# Altium PCB PCB_C70005-A1.PcbDoc (part 1 of 4)
Units mm, origin at the board's own origin, x right, y up, seen from the top; angles counter-clockwise.
Board outline 80.01 x 50.8 mm, 2 copper layers (Top Layer, Bottom Layer); 96 components, 63 nets, 254 pads, 376 vias.
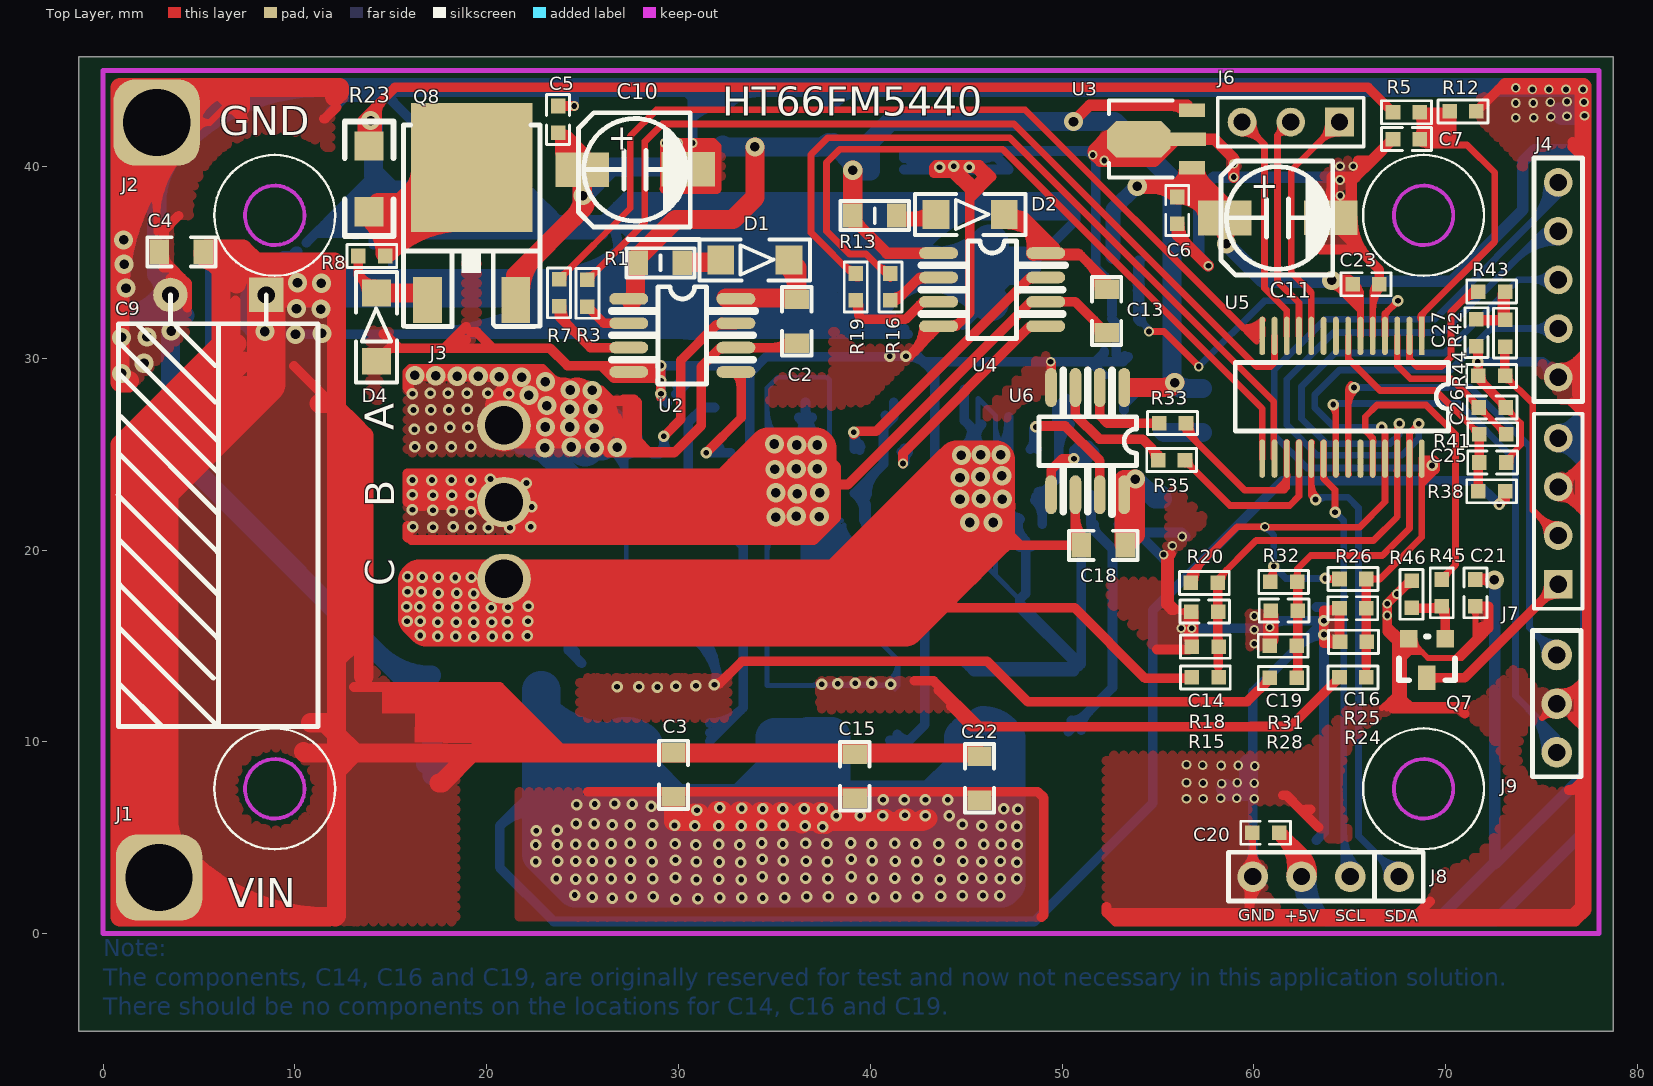
[diagram p0: Top Layer view]
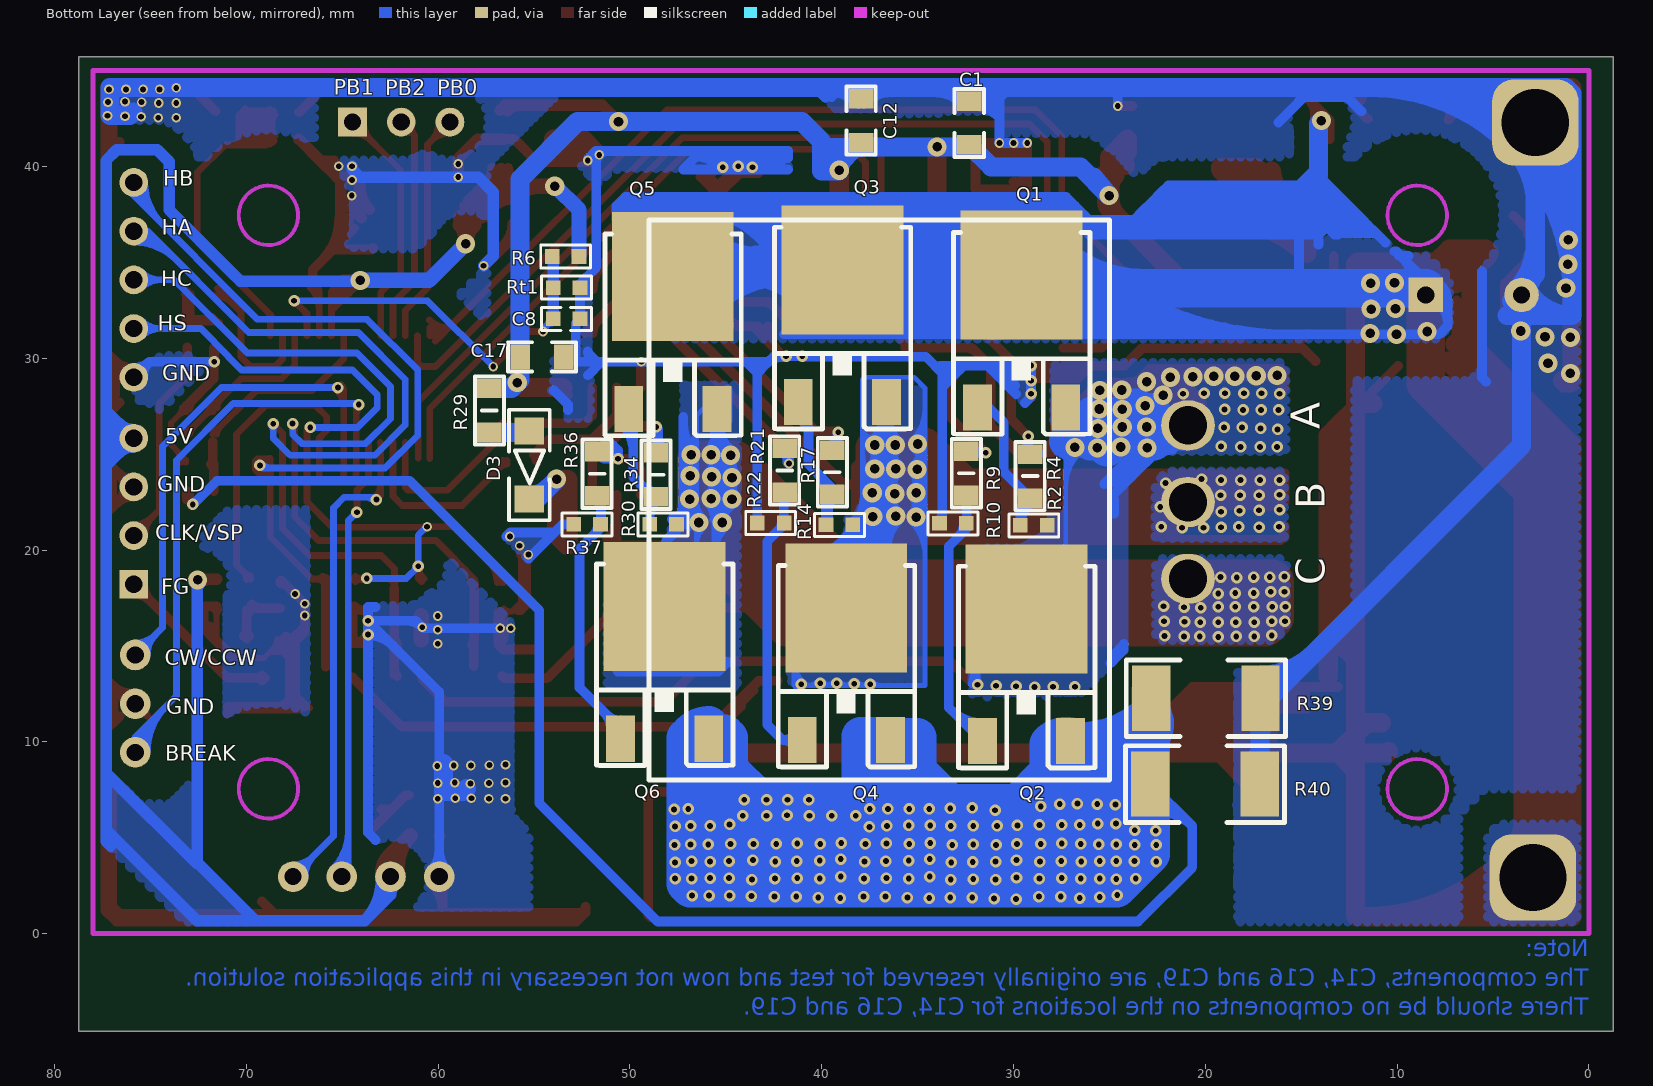
[diagram p1: Bottom Layer view, seen from below]

## Layer stack, top to bottom
Top Layer: signal copper 0.0356
Dielectric: dielectric 0.32, FR-4, Dk 4.8
Bottom Layer: signal copper 0.0356

## Board outline
-1.27,-5.08 78.74,-5.08 78.74,45.72 -1.27,45.72

## Design rules (kind name [scope] priority, off if disabled: settings)
Clearance [All] p1: gap=0.254
Clearance Clearance_1 [All vs InNet('GND')] p2: gap=1
ComponentClearance [All] p1: gap=0 collisioncheckmode=3 verticalgap=0 showdistances=FALSE
HoleToHoleClearance [All] p1: gap=0.1 allowstackedmicrovias=TRUE
MinimumSolderMaskSliver [All] p1: minsoldermaskwidth=0.1
PlaneConnect [All] p1: planeconnectstyle=Direct reliefexpansion=0.508 reliefentries=4 reliefconductorwidth=0.254 reliefairgap=0.254
PolygonConnect [All] p1: connectstyle=Direct reliefconductorwidth=0.254 reliefentries=4 polygonreliefangle="90 Angle" airgapwidth=0.254
RoutingVias [All] p1: holewidth=0.711 width=1.27 viastyle="Through Hole" minholewidth=0.3 minwidth=0.4 maxholewidth=0.711 maxwidth=1.27
SilkToSilkClearance [All] p1: silktosilkclearance=0
SilkscreenOverComponentPads [All] p1: minsilkscreentomaskgap=0
SolderMaskExpansion [All] p1: expansion=0.102
Width [All] p1: maxlimit=3 minlimit=0.254 preferedwidth=0.254
22 further rules are at their usual default settings.

## Classes and differential pairs
component class HT66FM5440_5240_SNLS_SixStep_V2: C1 C2 C5 C6 C7 C8 C9 C12 C13 C14 C16 C17 C18 C19 C20 C21 C23 C25 C26 C27 D1 D2 D3 J1 J2 J3 J4 J6 J7 J8 J9 Q1 Q2 Q3 Q4 Q5 Q6 Q7 Q8 R1 R2 R3 R4 R5 R6 R7 R8 R9 R10 R12 R13 R14 R15 R16 R17 R18 R19 R20 R21 R22 R24 R25 R26 R28 R29 R30 R31 R32 R33 R34 R35 R36 R37 R38 R39 R40 R41 R42 R43 R44 R45 R46 Rt1 U2 U3 U4 U5 U6

## Components (designator, comment, footprint, x,y, rotation, side; value= is the part's Value field where it differs from the comment)
C1 "104/25V" 0805C 32.309,43.409 r270 bottom
C2 "4.7uF/25V" 0805C 36.17,33.071 r270 top
C3 "4.7uF/25V" 0805C 29.743,9.423 r270 top (schematic designator C18)
C4 "4.7uF/25V" 0805C 5.22,35.547 r180 top (schematic designator C18)
C5 "104" 0603C 23.724,41.758 r90 top
C6 "104" 0603C 56.007,38.405 r270 top
C7 "104" 0603C 68.656,41.427 r180 top
C8 "104" 0603C 54,32.055 r180 bottom
C9 "470uF/50V" CD-10.5*21 8.509,33.299 r180 top
C10 "6.3V220uF" 贴片电解电容35V47UF 27.737,39.827 r0 top
C11 "6.3V220uF" 贴片电解电容35V47UF 61.239,37.313 r0 top
C12 "104/25V" 0805C 37.948,43.536 r270 bottom
C13 "4.7uF/25V" 0805C 52.324,33.604 r270 top
C14 "224" 0603C 56.744,16.789 r0 top
C15 "4.7uF/25V" 0805C 39.192,9.347 r270 top (schematic designator C18)
C16 "224" 0603C 64.465,16.967 r0 top
C17 "104/25V" 0805C 53.442,30.074 r0 bottom
C18 "4.7uF/25V" 0805C 53.289,20.244 r180 top
C19 "224" 0603C 60.884,16.84 r0 top
C20 "104" 0603C 59.919,5.258 r0 top
C21 "104" 0603C 71.552,18.466 r270 top
C22 "4.7uF/25V" 0805C 45.695,9.246 r270 top (schematic designator C18)
C23 "104" 0603C 66.548,33.858 r180 top
C25 "104" 0603C 71.755,24.562 r0 top
C26 "105" 0603C 71.73,27.432 r0 top
C27 "105" 0603C 71.603,32.029 r270 top
D1 "1N4148" 1206D 32.207,35.128 r0 top
D2 "1N4148" 1206D 43.434,37.49 r0 top
D3 "1N4148" 1206D 55.245,26.213 r270 bottom
D4 "1N4148" 1206D 14.249,29.845 r90 top (schematic designator D2)
J1 "CON1" SIP1-big 2.921,2.921 r0 top
J2 "CON1" SIP1-big 2.794,42.291 r0 top
J3 "3-phase BLDC" SIP3-4mm 20.9,22.5 r180 top
J4 "BEMF_2.54mm" SIP5-2.54mm 75.87,39.167 r0 top
J6 "Obsever pin" HDR1X3 64.465,42.316 r180 top
J7 "Speed command" HDR1X4 75.87,18.212 r90 top
J8 "OCDS" SIP4 67.564,2.972 r180 top
J9 "Control port" SIP3-2.54mm 75.794,9.449 r180 top
Q1 "75NF75" TO252 31.877,27.432 r180 bottom
Q2 "75NF75" TO252 31.623,10.033 r180 bottom
Q3 "75NF75" TO252 41.224,27.711 r180 bottom
Q4 "75NF75" TO252 41.021,10.084 r180 bottom
Q5 "75NF75" TO252 50.063,27.356 r180 bottom
Q6 "75NF75" TO252 50.495,10.16 r180 bottom
Q7 "2N3904" SOT-23 69.037,14.351 r180 top
Q8 "LM317/TO-252" TO252 16.916,33.045 r0 top (schematic designator U1)
R1 "33R" 0805R 27.915,34.976 r0 top
R2 "10K" 0603R 28.245,21.285 r180 bottom
R3 "1K" 0603R 25.248,34.087 r90 top
R4 "33R" 0805R 29.134,22.708 r90 bottom
R5 "91K" 0603R 68.656,42.824 r0 top
R6 "10K" 0603R 54.051,35.306 r0 bottom
R7 "1K" 0603R 23.774,34.112 r90 top
R8 "240R" 0603R 13.31,35.331 r180 top
R9 "33R" 0805R 32.461,25.146 r270 bottom
R10 "10K" 0603R 32.461,21.387 r180 bottom
R12 "10K" 0603R 71.603,42.875 r0 top
R13 "33R" 0805R 39.091,37.44 r0 top
R14 "10K" 0603R 38.379,21.311 r180 bottom
R15 "22K" 0603R 56.769,13.36 r180 top
R16 "1K" 0603R 41.046,34.417 r90 top
R17 "33R" 0805R 39.446,22.911 r90 bottom
R18 "2K" 0603R 56.769,14.961 r180 top
R19 "1K" 0603R 39.243,34.417 r90 top
R20 "10K/1%" 0603R 56.718,18.288 r180 top
R21 "33R" 0805R 41.935,25.298 r270 bottom
R22 "10K" 0603R 41.961,21.412 r180 bottom
R23 "0R" 1206 13.868,41.072 r270 top
R24 "22K" 0603R 64.465,13.36 r180 top
R25 "2K" 0603R 64.491,15.215 r180 top
R26 "10K/1%" 0603R 64.465,18.491 r180 top
R28 "22K" 0603R 60.833,13.335 r180 top
R29 "33R" 0805R 57.328,28.423 r270 bottom
R30 "10K" 0603R 47.574,21.336 r180 bottom
R31 "2K" 0603R 60.833,15.011 r180 top
R32 "10K/1%" 0603R 60.858,18.339 r180 top
R33 "1K" 0603R 56.464,26.619 r0 top
R34 "33R" 0805R 48.641,22.784 r90 bottom
R35 "1K" 0603R 56.413,24.689 r0 top
R36 "33R" 0805R 51.714,25.121 r270 bottom
R37 "10K" 0603R 51.537,21.336 r180 bottom
R38 "1K/1%" 0603R 71.704,23.063 r180 top
R39 "0.01R" 2512 17.12,12.268 r0 bottom
R40 "0.01R" 2512 17.17,7.798 r0 bottom
R41 "10K" 0603R 73.152,26.035 r0 top
R42 "4.7K" 0603R 73.101,30.607 r270 top
R43 "0R" 0603R 73.101,33.477 r0 top
R44 "1M" 0603R 71.704,29.083 r180 top
R45 "4.7K" 0603R 69.799,17.069 r270 top
R46 "5.1K" 0603R 68.224,18.39 r90 top
Rt1 "68K" 0603R 52.603,33.68 r180 bottom
U2 "IR2101/SOP-8" SOP-8 27.407,33.096 r0 top
U3 "78L05" SOT-89 56.769,39.929 r90 top
U4 "IR2101/SOP-8" SOP-8 43.561,35.484 r0 top
U5 "HT66FM5440/28SSOP" SSOP28 68.758,31.166 r270 top
U6 "IR2101/SOP-8" SOP-8 53.238,28.473 r270 top

## Footprints (in the part's own frame and the unit in brackets; to place one, negate y for a bottom-side part, rotate by r counter-clockwise, add the part's x,y. Pads: shape width x height; smd on the part's side, far side on the other; paste and mask are expansions set on the pad)
0603C [mil]
  rect 30x30 smd: 1(55,0) 2(0,0)
  silkscreen extent -24,-24 79,24
0603R [mil]
  rect 30x30 smd: 1(0,0) 2(-55,0)
  silkscreen extent -79,-24 24,24
0805C [mil]
  rect 40x50 smd: 1(0,0) 2(90,0)
  silkscreen extent -25,-30 115,30
0805R [mil]
  rect 40x50 smd: 1(0,0) 2(90,0)
  silkscreen extent -25,-30 115,30
1206 [mil]
  rect 60x60 smd: 1(0,0) 2(135,0)
  silkscreen extent -50,-50 185,50
1206D [mm]
  rect 1.4x1.524 smd: 1(0,0) 2(3.553,0)
  silkscreen extent -1.1,-1.07 4.66,1.07
2512 [mm]
  rect 2x3.4 smd: 1(0,0) 2(5.7,0)
  silkscreen extent -1.3,-2 7,2
CD-10.5*21 [mm]
  rect 1.8x1.8 hole 0.9: 1(0,0)
  round 1.8 hole 0.9: 2(5,0)
  silkscreen extent -2.7,0 7.75,22.5
HDR1X3 [mm] "Connector; Header; 3 Position"
  rect 1.5x1.5 hole 0.9: 1(0,0)
  round 1.5 hole 0.9: 2(2.54,0) 3(5.08,0)
  silkscreen extent -1.27,-1.27 6.35,1.27
HDR1X4 [mm] "Connector; Header; 4 Position"
  rect 1.5x1.5 hole 0.9: 1(0,0)
  round 1.5 hole 0.9: 2(2.54,0) 3(5.08,0) 4(7.62,0)
  silkscreen extent -1.27,-1.27 8.89,1.27
SIP1-big [mm]
  rrect50% 4.5x4.5 hole 3.5: 1(0,0)
SIP3-2.54mm [mm]
  round 1.6 hole 0.9: 1(0,0) 2(0,-2.54) 3(0,-5.08)
  silkscreen extent -1.27,-6.35 1.27,1.27
SIP3-4mm [mm]
  oval 2.8x2.6 hole 2: 1(0,-4) 2(0,0) 3(0,4)
SIP4 [mm]
  round 1.6 hole 0.9: 1(0,0) 2(2.54,0) 3(5.08,0) 4(7.62,0)
  silkscreen extent -1.27,-1.27 8.89,1.27
SIP5-2.54mm [mm]
  round 1.5 hole 0.9: 1(0,0) 2(0,-2.54) 3(0,-5.08) 4(0,-7.62) 5(0,-10.16)
  silkscreen extent -1.27,-11.43 1.27,1.27
SOP-8 [mil]
  oval 80x24 smd: 1(0,0) 2(0.02,-50) 3(0,-100) 4(0,-150) 5(220,-150) 6(220,-100) 7(220,-50) 8(220,0)
  silkscreen extent -35,-175 260,25
SOT-23 [mil]
  rect 36x36 smd: 1(-37.5,-40) 2(37.5,-40)
  rect 36x50 smd: 3(0.5,40)
  silkscreen extent -58,-45 58,45
SOT-89 [mm]
  rect 0.7x1.35 smd: 1(0,0) 3(3,0)
  oct 1.9x3.3 smd: 2(1.5,2.775)
  rect 0.7x1.9 smd: 2(1.5,0.225)
  silkscreen extent -0.51,1.02 3.51,4.32
SSOP28 [mm]
  rect 2x0.3 smd: 1(0,0)
  oval 2x0.3 smd: 2(0,-0.64) 3(0,-1.28) 4(0,-1.92) 5(0,-2.56) 6(0,-3.2) 7(0,-3.84) 8(0,-4.48) 9(0,-5.12) 10(0,-5.76) 11(0,-6.4) 12(0,-7.04) 13(0,-7.68) 14(0,-8.32) 15(6.4,-8.32) 16(6.4,-7.68) 17(6.4,-7.04) 18(6.4,-6.4) 19(6.4,-5.76) 20(6.4,-5.12) 21(6.4,-4.48) 22(6.4,-3.84) 23(6.4,-3.2) 24(6.4,-2.56) 25(6.4,-1.92) 26(6.4,-1.28) 27(6.4,-0.64) 28(6.4,0)
  silkscreen extent 1.4,-9.73 4.95,1.4
TO252 [mm]
  rect 1.5x2.4 smd: 1(0,0) 3(4.6,0)
  rect 6.35x6.73 smd: 2(2.3,6.9)
  silkscreen extent -1.24,-1.4 5.87,9.12
贴片电解电容35V47UF [mm]
  rect 2.8x1.8 smd: 1(-2.75,0) 1(2.775,0.025)
  silkscreen extent -2.95,-2.97 2.88,2.98

## Part data
C1 C5 C6 C7 C8 C12 C14 C16 C17 C19 C20 C21 C23 C25 C26 C27: library part Cap, "Capacitor"
C2 C3 C4 C9 C13 C15 C18 C22: library part "Cap Pol1", "Polarized Capacitor (Radial)"
D1 D2 D3 D4: library part "Diode 1N4448", "High Conductance Fast Diode"
J3: library part "3-phase BLDC_2.54mm", "3-phase BLDC_2.54mm"
J6 J9: library part "Header 3", "Header, 3-Pin"
J7 J8: library part "Header 4", "Header, 4-Pin"
Q1 Q2 Q3 Q4 Q5 Q6: library part iM1801, "NMOS"
Q7: "NPN General Purpose Amplifier"
Q8: library part LM317, "LM317"
R1 R2 R3 R4 R5 R6 R7 R8 R9 R10 R12 R13 R14 R15 R16 R17 R18 R19 R20 R21 R22 R24 R25 R26 R28 R29 R30 R31 R32 R33 R34 R35 R36 R37 R38 R39 R40 R41 R42 R43 R44 R45 R46 Rt1: library part Res1, "Resistor"
U2 U4 U6: library part iT2101L
U5: library part HT66FM5440

## Via types
v1: diameter 0.6, hole 0.3, Top Layer to Bottom Layer, 247 vias
v2: diameter 1, hole 0.5, Top Layer to Bottom Layer, 69 vias
v3: diameter 0.5, hole 0.3, Top Layer to Bottom Layer, 60 vias

## Nets (pads, with @x,y where several pads share a name; then routed paths per layer and width w, separated by ;. In a path a pad name is that pad's centre, name@x,y a point inside that pad or via, vN(x,y) a via of type N, cw(c..) or ccw(c..) an arc to the next point about the centre after c; other vN are vias at no path point)
5V: C6.2 C11.1@58.489,37.313 C20.1 C21.2 C23.1 J7.4 J8.3 R6.2 U3.1 U5.6 | length 211.5
  Top Layer w0.35: J8.3@62.103,3.353 J8.3@62.484,2.972 ; v2@64.056,34.086 cw(c64.136,33.366) 64.648,33.878 ; v2@64.059,33.736 cw(c64.059,33.136) 64.484,33.56 ; v2@64.094,33.738 cw(c64.238,32.437) 65.164,33.363 ; v2@64.11,33.934 64.186,33.858 65.164,32.88 ; v2@64.384,34.061 ccw(c65.352,34.061) 64.667,33.377 ; 64.668,33.858 65.164,33.363 ; C23.1@65.009,33.709 cw(c63.787,32.427) 65.558,32.427 ; C23.1@65.151,33.652 cw(c65.151,33.155) 65.503,33.507 cw(c65.854,33.858) C23.1@65.357,33.858 ; C23.1@65.151,33.858 C23.1@65.164,33.846 ; 65.164,33.33 ccw(c64.623,33.33) 65.005,33.713 cw(c64.163,32.87) 65.354,32.87 ; C23.1@65.25,33.962 cw(c64.566,33.245) 65.558,33.245 ; U5.6@65.558,31.166 65.558,32.486 ; 65.164,32.88 65.164,33.363 ; 65.164,32.88 65.354,32.69 ; 65.164,33.363 ccw(c64.699,33.363) 65.012,33.706 cw(c64.699,33.363) 65.164,33.363 ; 65.164,33.363 C23.1@65.164,33.846 ; 65.164,33.392 cw(c65.618,33.392) C23.1@65.297,33.713 ; 65.164,33.392 cw(c65.618,33.392) C23.1@65.297,33.713 ; 65.164,33.392 cw(c65.618,33.392) C23.1@65.297,33.713 ; C23.1@65.164,33.846 C23.1@65.354,33.655 ; 65.354,32.69 C23.1@65.354,33.655 ; 65.354,32.69 65.558,32.486 ; C23.1@65.354,33.655 65.558,33.451 65.558,32.486
  Top Layer w0.5: C6.2@56.007,38.274 cw(c56.007,36.547) C11.1@57.228,37.768 ; 56.043,39.203 ccw(c55.318,39.929) U3.1@56.344,39.929 ; U3.1@56.694,39.929 ccw(c57.617,39.929) 56.964,39.276 ; C11.1@57.096,37.9 cw(c56.509,37.313) C11.1@57.339,37.313 ; 57.119,38.745 cw(c58.018,39.264) U3.1@57.175,39.87 ; U3.1@57.191,39.903 ccw(c58.352,39.592) 57.311,38.991 ; 57.31,38.931 cw(c55.981,37.602) C11.1@57.841,37.334 ; C11.1@57.346,37.405 ccw(c54.748,37.78) U3.1@56.604,39.637 ; 57.355,39.343 cw(c55.955,37.943) C11.1@57.846,37.357 ; C11.1@57.369,37.505 ccw(c55.06,38.22) U3.1@56.769,39.929 ; C11.1@57.415,37.616 ccw(c56.821,37.93) 57.296,38.405 ; 57.495,39.203 cw(c58.22,39.929) 57.194,39.929 ccw(c59.324,39.929) 57.818,38.423 ; C11.1@57.56,38.141 ccw(c57.989,38.57) C11.1@57.989,37.963 ; C11.1@57.906,37.957 cw(c57.703,39.517) 56.591,38.405 ; 57.941,38.757 cw(c56.85,37.666) C11.1@58.324,37.209 ; 58.016,38.225 cw(c57.215,37.424) C11.1@58.336,37.263 ; C11.1@58.079,37.816 ccw(c57.634,38.361) 58.337,38.361 ; C11.1@58.413,36.954 ccw(c59.56,36.954) v2@58.749,36.143 ; C11.1@58.489,37.313 58.489,38.208 58.337,38.361 ; C11.1@58.659,37.94 cw(c58.773,38.361) 58.337,38.361 ; v2@58.682,36.191 cw(c58.89,36.62) 58.413,36.62 C11.1@58.413,37.287 ; U3.1@56.477,39.637 56.007,39.167 C6.2@56.007,38.405 56.591,38.405 ; U3.1@56.477,39.637 U3.1@56.769,39.929 ; U3.1@56.477,39.637 U3.1@56.604,39.637 ; 56.591,38.405 57.296,38.405 ; 56.591,38.405 57.709,37.287 C11.1@58.337,37.287 ; U3.1@56.604,39.637 C11.1@58.337,37.904 ; U3.1@56.769,39.929 58.337,38.361 ; 57.296,38.405 C11.1@58.337,37.363 ; C11.1@58.337,37.287 C11.1@58.337,37.363 ; C11.1@58.337,37.287 C11.1@58.413,37.287 ; C11.1@58.337,37.363 C11.1@58.337,37.904 ; C11.1@58.337,37.363 C11.1@58.413,37.287 ; C11.1@58.337,37.904 58.413,37.827 C11.1@58.413,37.287 ; C11.1@58.337,37.904 58.337,38.361
  Top Layer w0.6: v2(64.059,34.061) 64.948,34.061 C23.1@65.151,33.858 64.668,33.858 ; v2@64.186,33.858 64.668,33.858 ; v2@64.2,34.203 ccw(c65.032,35.035) C23.1@65.032,33.858 ; C21.2@71.552,18.466 72.517,18.466 v2(72.542,18.44) ; 71.998,18.466 cw(c71.998,17.896) v2@72.401,18.299 ; 64.668,33.858 cw(c64.668,34.321) 64.243,34.14 ccw(c64.668,34.321) 64.668,33.858
  Top Layer w0.8: v2(53.924,38.964) 55.448,38.964 ; 54.704,38.964 cw(c54.704,37.102) C6.2@56.02,38.418 ; 55.804,38.964 55.448,38.964 ; C6.2@56.007,38.405 55.448,38.964 ; C11.1@58.147,36.948 cw(c57.221,35.964) v2@58.572,35.964 ; C11.1@58.413,37.287 58.572,37.128 v2(58.572,35.966) ; v2@58.572,36.306 cw(c59.496,36.306) C11.1@58.843,36.959 ; J8.3@62.091,3.047 ccw(c59.82,3.483) 61.455,5.118 62.484,4.089 J8.3@62.484,2.972 ; J8.3@62.201,3.255 ccw(c61.518,3.937) 62.484,3.937 ccw(c63.45,3.937) J8.3@62.767,3.255 ; 62.522,4.051 cw(c61.611,3.139) J8.3@62.877,2.896 ; 55.448,38.964 cw(c55.448,38.385) 56.026,38.405 ccw(c55.448,38.385) 55.448,38.964
  Top Layer w1: C11.1@58.413,37.287 C11.1@58.725,37.287
  Bottom Layer w0.508: 77.089,4.521 77.365,4.797 77.365,5.74
  Bottom Layer w0.6: J8.3@62.205,2.557 cw(c61.851,2.032) 62.484,2.032 ; J8.3@62.384,2.978 ccw(c64.143,2.865) 62.897,1.619 ; J8.3@62.484,2.972 62.484,2.032 ; J8.3@62.763,2.557 ccw(c63.117,2.032) 62.484,2.032 ; J8.3@62.983,2.94 ccw(c65.906,2.752) 63.835,0.681 ; v2(64.059,34.061) 64.11,34.011 70.307,34.011 74.028,37.732 74.028,40.246 74.651,40.869 76.759,40.869 77.319,40.308 77.319,27.281 ; v2@64.2,34.203 ccw(c64.664,34.667) 64.664,34.011 ; 69.54,0.681 72.568,3.708 v2@72.568,18.44 ; v2@72.401,18.299 cw(c71.998,17.896) 72.568,17.896 ; 72.568,3.632 77.174,8.238 ; J7.4@75.87,25.382 cw(c75.87,24.295) 76.638,25.064 cw(c77.406,25.832) J7.4@76.32,25.832 ; J7.4@75.87,26.282 ccw(c75.87,27.368) 76.638,26.6 ccw(c77.406,25.832) J7.4@76.32,25.832 ; J7.4@75.957,25.39 cw(c76.13,24.518) 76.759,25.147 ; J7.4@76.014,26.258 ccw(c76.325,27.18) 77.013,26.492 ; J7.4@76.241,26.086 ccw(c77.013,26.615) 77.013,25.679 ; 76.493,25.413 cw(c76.912,25.832) J7.4@76.32,25.832 ; 77.294,24.613 76.759,25.147 ; 62.484,2.032 63.835,0.681 ; 63.835,0.681 72.588,0.681 77.319,5.412 77.319,24.383 ; J7.4@75.87,25.832 77.319,27.281 ; J7.4@75.87,25.832 J7.4@76.074,25.832 ; J7.4@75.87,25.832 77.319,24.383 ; J7.4@76.074,25.832 J7.4@76.352,25.832 ; J7.4@76.074,25.832 J7.4@76.352,25.554 ; J7.4@76.352,25.554 76.759,25.147 ; J7.4@76.352,25.554 J7.4@76.352,25.832 ; J7.4@76.352,25.832 77.013,26.492 ; J7.4@76.352,25.832 76.505,25.679 77.013,25.679 ; 76.759,25.147 77.013,25.4 77.013,25.679 ; 77.013,25.679 77.013,26.492 ; 77.319,24.383 77.319,27.281
  Bottom Layer w0.8: R6.2@52.654,35.306 52.654,37.744 v2@53.899,38.989 ; v2(58.572,35.966) 60.477,34.061 v2(64.059,34.061)
+15V: C1.2 C5.2 C10.1@24.987,39.827 C12.2 C17.2 Q8.3 R1.1 R13.1 R29.1 U2.1 U3.3 U4.1 U6.1 | length 106.8
  Top Layer w0.5: U6.1@53.213,28.067 U6.1@53.227,28.067
  Top Layer w0.6: R13.1@39.091,37.262 40.869,35.484 U4.1@44.145,35.484 ; R13.1@39.299,37.313 ccw(c39.923,37.313) R13.1@39.482,36.871 ; v2(50.597,42.342) 51.435,43.18 56.518,43.18 U3.3@56.769,42.929 ; 55.717,43.18 cw(c55.717,42.202) U3.3@56.409,42.893
  Top Layer w1: Q8.3@21.516,33.045 21.516,34.318 24.987,37.788 ; Q8.3@21.766,33.495 cw(c24.356,33.495) 22.525,35.326 ; C10.1@24.16,40.058 ccw(c23.37,40.616) 24.054,41.3 ; 24.552,37.354 ccw(c23.425,38.481) v2(25.019,38.481) cw(c24.623,38.152) 24.987,37.788 ; C10.1@24.704,39.544 cw(c24.021,38.862) 24.987,38.862 cw(c25.952,38.862) C10.1@25.27,39.544 ; U2.1@27.545,32.958 ccw(c27.019,33.483) 27.762,33.483 ; U2.1@27.762,33.35 27.762,35.154 29.845,37.236 32.842,37.236 33.985,38.379 v2(33.985,41.021) ; R13.1@39.091,37.262 v2(39.091,39.802) ; U6.1@53.492,28.473 55.626,28.473 v2(55.88,28.727) cw(c55.267,29.341) 55.267,28.473 ; 24.054,41.3 24.054,41.427 24.987,40.494 C10.1@24.987,40.367 ; 24.054,41.3 24.054,40.76 C10.1@24.987,39.827 ; 24.054,41.3 C10.1@24.987,40.367 ; 24.987,37.788 C10.1@24.987,39.827 ; C10.1@24.987,39.827 C10.1@24.987,40.367
  Bottom Layer w1: 25.832,39.446 v2(25.019,38.481) 26.518,39.98 31.166,39.98 C1.2@32.309,41.123 32.414,41.018 34.571,41.018 ; v2(33.985,41.021) 34.571,41.018 ; 37.193,41.002 ccw(c37.198,41.88) C12.2@37.815,41.255 ; C12.2@38.08,41.255 ccw(c38.707,41.882) 38.707,40.996 ; 38.839,40.409 cw(c38.232,39.802) v2(39.091,39.802) ; 39.751,40.996 C12.2@38.252,40.996 ; 39.929,40.513 40.005,40.437 ; 56.616,28.423 cw(c56.616,29.463) v2(55.88,28.727) ; R29.1@57.328,28.423 56.185,28.423 v2(55.88,28.727) ; 34.571,41.018 35.509,41.012 37.946,40.997 C12.2@38.252,40.996 ; C12.2@38.252,40.996 39.091,40.157 v2(39.091,39.802) ; v2(39.091,39.802) 39.116,39.776 40.005,39.776 40.005,40.437 ; 40.005,40.437 40.005,41.3 41.046,42.342 v2(50.597,42.342) 52.73,42.342 55.728,39.345 C17.2@55.728,30.074 55.728,28.88 v2(55.88,28.727)
BAT: C3.1 C4.1 C9.1 C15.1 C22.1 J1.1 Q1.2 Q3.2 Q5.2 R5.2 R23.1 | length 1417.8
  Top Layer w0.5: v2@11.328,33.655 11.938,33.655 ; R23.1@13.526,41.452 ccw(c12.68,42.393) v2(13.945,42.393) ; R23.1@13.591,41.502 ccw(c13.262,42.012) v2@13.868,42.012 ; R23.1@13.706,41.702 cw(c14.46,41.501) v2@14.07,42.176 ; v2@13.729,42.266 cw(c13.146,41.925) R23.1@13.798,41.75 ; v2@13.728,42.268 cw(c13.205,41.966) 13.788,41.81 cw(c14.371,41.653) v2@14.07,42.176 ; v2@13.768,42.216 cw(c13.341,41.789) 13.945,41.789 cw(c14.548,41.789) v2@14.121,42.216 ; 13.828,41.861 cw(c14.329,41.727) v2@14.07,42.176 ; R23.1@13.868,41.072 R23.1@14.23,41.434 ; R23.1@13.945,41.199 v2(13.945,42.393) ; v2@13.945,42.124 ccw(c14.92,42.124) R23.1@14.23,41.434 ; 13.991,41.85 cw(c14.319,41.937) v2@14.103,42.199 ; R23.1@14.044,41.752 cw(c14.584,41.897) v2@14.142,42.239 ; R23.1@14.146,41.502 cw(c14.475,42.012) v2@13.868,42.012 ; v2@14.195,42.393 cw(c15.902,42.393) 14.695,43.6 ; R5.2@67.259,42.824 65.964,44.12 15.215,44.12 14.287,43.193 ; v2@13.513,42.393 13.513,41.44 13.506,41.434 ccw(c12.632,42.308) 13.868,42.308 ccw(c15.104,42.308) R23.1@14.23,41.434 ; v2@13.513,42.393 13.513,42.418 v2@13.868,42.774 ; v2@13.513,42.393 v2@13.868,42.393 ; v2@13.868,42.012 v2@13.868,42.393 ; v2@13.868,42.393 v2@13.868,42.774 ; v2@13.868,42.393 v2(13.945,42.393) ; v2@13.868,42.774 14.173,43.078 ; 14.173,43.078 14.287,43.193 ; 14.173,43.078 14.173,41.491 R23.1@14.23,41.434 ; R23.1@14.23,41.434 14.287,41.491 14.287,43.193
  Top Layer w0.508: 6.909,31.039 6.909,33.017 ; 9.957,29.591 11.913,27.635 12.161,27.387 ; 11.709,35.025 12.065,34.67 12.065,33.553 ; 13.081,12.852 20.676,12.852 21.234,12.294 ; R23.1@13.59,41.497 ccw(c13.253,42.012) v2@13.868,42.012 ; v2@13.732,42.27 cw(c13.143,41.93) R23.1@13.799,41.754 ; 13.831,41.871 cw(c14.322,41.739) v2@14.068,42.18 ; R23.1@13.868,41.072 v2@13.868,42.012 ; R23.1@13.868,41.615 cw(c14.722,41.615) v2@14.119,42.219 ; R23.1@14.147,41.497 cw(c14.484,42.012) v2@13.868,42.012 ; 20.777,11.557 20.828,11.506 21.615,11.506 ; 22.301,10.693 22.479,10.516 22.987,10.516 23.368,10.135 23.292,10.058 22.25,10.058 22.25,11.278 ; 24.105,9.423 22.25,11.278 ; 21.234,12.294 21.234,11.887 21.615,11.506 ; 21.234,12.294 21.819,11.709 ; 21.615,11.506 21.819,11.709 ; 21.819,11.709 22.25,11.278
  Top Layer w1: 0.881,4.828 ccw(c4.828,4.828) J1.1@2.037,2.037 ; 0.881,7.242 ccw(c7.242,7.242) 2.744,2.744 cw(c5.567,5.567) 1.575,5.567 ; 0.881,9.657 ccw(c9.657,9.657) 3.451,3.451 cw(c7.982,7.982) 1.575,7.982 ; 0.881,12.071 ccw(c12.071,12.071) 4.158,4.158 cw(c10.396,10.396) 1.575,10.396 ; J1.1@2.016,2.059 ccw(c4.763,4.674) 4.763,0.881 ; J1.1@2.037,3.805 1.575,4.267 1.575,21.869 ; J1.1@2.74,2.749 ccw(c7.095,6.894) 7.095,0.881 ; J1.1@3.464,3.438 ccw(c9.428,9.113) 9.428,0.881 ; J1.1@4.189,4.127 ccw(c11.76,11.332) 11.76,0.881 0.881,0.881 0.881,25.494 6.147,30.759 ; C4.1@5.225,35.426 ccw(c6.193,36.393) 6.193,35.025 ; C4.1@5.227,35.423 ccw(c5.818,35.663) 5.818,35.025 ; 6.96,33.884 5.818,35.025 ; 7.31,29.845 7.31,29.789 1.829,24.308 ; 7.493,28.575 7.391,28.575 2.794,23.978 2.159,23.978 ; 7.575,34.589 cw(c6.285,33.299) C9.1@8.109,33.299 ; C9.1@8.509,33.655 7.139,35.025 ; v2@10.236,33.655 8.866,35.025 ; 10.447,9.482 10.506,9.423 12.161,9.423 ; 10.82,10.998 11.557,10.998 12.161,10.394 ; 11.252,27.635 11.913,27.635 ; 12.116,0.881 12.161,0.926 12.161,8.484 ; 13.589,13.411 13.589,25.959 13.005,26.543 ; 17.526,7.849 17.653,7.849 19.228,9.423 ; C22.1@45.695,9.246 45.517,9.423 C3.1@29.743,9.423 24.105,9.423 19.228,9.423 ; 1.575,21.869 2.159,22.454 2.159,23.978 ; 1.575,21.869 1.575,24.054 ; 1.575,24.054 1.575,24.562 ; 1.575,24.054 1.829,24.308 ; 1.575,24.562 1.829,24.308 ; 1.575,24.562 1.575,25.349 6.985,30.759 6.147,30.759 ; 1.829,24.308 2.159,23.978 ; 5.818,35.025 7.139,35.025 ; 6.147,30.759 6.147,34.62 C4.1@5.22,35.547 5.359,35.687 7.284,35.687 7.946,35.025 ; 7.139,35.025 7.946,35.025 ; 7.946,35.025 8.866,35.025 ; 8.866,35.025 11.709,35.025 12.055,35.025 12.161,34.919 12.161,27.387 ; 12.161,8.484 13.101,9.423 ; 12.161,8.484 12.161,9.423 ; 12.161,9.423 12.161,10.394 ; 12.161,9.423 13.101,9.423 ; 12.161,10.394 13.132,9.423 ; 12.161,10.394 12.161,14.3 ; 12.161,14.3 13.005,15.144 13.005,26.543 ; 12.161,14.3 12.161,27.387 ; 12.161,27.387 13.005,26.543 ; 13.101,9.423 13.132,9.423 ; 13.132,9.423 19.228,9.423
  Top Layer w2: J1.1@2.037,3.805 ccw(c-0.097,5.939) 2.921,5.939 ccw(c5.939,5.939) J1.1@3.805,3.805 ; J1.1@2.921,2.921 2.921,23.073 8.509,28.661 8.509,33.655 10.236,33.655 v2@11.328,33.655
  Bottom Layer w0.5: 7.366,31.866 cw(c8.657,31.866) C9.1@8.524,33.15 ; 7.366,32.421 cw(c8.6,32.421) C9.1@8.473,33.648 ; 7.366,32.975 cw(c8.542,32.975) C9.1@8.422,34.145 ; C9.1@8.509,33.655 C9.1@8.509,34.041 ; C9.1@8.658,33.32 cw(c10.195,33.532) 9.098,34.63 ; C9.1@9.153,33.388 cw(c11.445,33.705) 9.809,35.341 ; 10.141,35.568 10.036,35.568 9.809,35.341 C9.1@8.509,34.041 ; 13.564,36.754 13.767,36.754 14.097,36.754 14.63,36.754 15.113,36.754 ; 15.113,33.68 15.113,36.373 15.113,36.449 15.113,36.754 ; 15.514,31.242 ccw(c15.514,48.205) Q1.2@27.509,36.21 ; 16.721,31.242 ccw(c16.721,46.998) Q1.2@27.862,35.857 ; 17.928,31.242 ccw(c17.928,45.791) Q1.2@28.216,35.503 ; 19.136,31.242 ccw(c19.136,44.583) Q1.2@28.569,35.15 ; 20.343,31.242 ccw(c20.343,43.376) Q1.2@28.923,34.796 ; 21.55,31.242 ccw(c21.55,42.169) Q1.2@29.276,34.443 ; 22.757,31.242 ccw(c22.757,40.962) Q1.2@29.63,34.089 ; 23.964,31.242 ccw(c23.964,39.755) Q1.2@29.984,33.735 ; 24.187,31.242 ccw(c24.187,49.159) Q3.2@36.856,36.49 ; 24.744,31.229 ccw(c23.616,37.593) Q1.2@29.209,34.355 ; 25.171,31.242 ccw(c25.171,38.548) Q1.2@30.337,33.382 ; 25.394,31.242 ccw(c25.394,47.952) Q3.2@37.209,36.136 ; 25.658,31.276 ccw(c24.81,37.814) Q1.2@30.033,33.791 ; 25.802,31.416 ccw(c24.832,36.889) Q1.2@29.642,34.104 ; 26.378,31.242 ccw(c26.378,37.341) Q1.2@30.691,33.028 ; Q1.2@26.601,31.242 ccw(c26.601,46.745) Q3.2@37.563,35.783 ; 26.797,37.948 26.289,37.44 26.06,37.211 25.603,36.754 ; Q1.2@26.856,31.432 ccw(c26.162,36.772) Q1.2@30.429,33.486 ; Q1.2@26.861,31.604 ccw(c26.049,36.184) Q1.2@30.075,33.854 ; Q1.2@27.585,31.242 ccw(c27.585,36.134) Q1.2@31.044,32.675 ; Q1.2@27.599,33.516 ccw(c30.781,34.523) Q1.2@31.223,31.214 ; Q1.2@27.808,31.242 ccw(c27.808,45.537) Q3.2@37.917,35.429 ; Q1.2@27.98,32.817 ccw(c31.334,35.6) Q1.2@31.334,31.242 ; Q1.2@28.075,33.667 ccw(c31.357,34.705) Q1.2@31.813,31.293 ; Q1.2@28.365,33.136 ccw(c32.398,36.483) Q1.2@32.398,31.242 ; Q1.2@28.513,32.981 ccw(c32.872,37.739) 33.423,31.309 ; Q1.2@28.552,33.818 ccw(c31.934,34.888) Q1.2@32.403,31.372 ; Q1.2@28.75,33.456 ccw(c33.463,37.367) 33.463,31.242 ; Q1.2@29.015,31.242 ccw(c29.015,44.33) Q3.2@38.27,35.075 ; Q1.2@29.029,33.969 ccw(c32.51,35.07) 32.993,31.451 ; Q1.2@29.135,33.775 ccw(c34.528,38.25) 34.528,31.242 ; Q1.2@29.505,34.119 ccw(c33.086,35.252) 33.583,31.53 ; Q1.2@29.519,34.094 ccw(c35.592,39.134) 35.592,31.242 ; Q1.2@29.577,34.332 27.155,36.754 25.603,36.754 ; Q1.2@29.904,34.413 ccw(c36.657,40.018) 36.657,31.242 ; Q1.2@29.982,34.27 ccw(c33.663,35.435) 34.173,31.608 ; Q1.2@30.222,31.242 ccw(c30.222,43.123) Q3.2@38.624,34.722 ; Q1.2@30.289,34.733 ccw(c37.722,40.901) 37.722,31.242 ; Q1.2@30.674,35.052 ccw(c38.786,41.785) 38.786,31.242 ; Q1.2@31.058,35.371 ccw(c39.851,42.668) 39.851,31.242 ; Q1.2@31.43,31.242 ccw(c31.43,41.916) Q3.2@38.977,34.368 ; Q1.2@31.443,35.691 ccw(c40.916,43.552) 40.916,31.242 ; Q1.2@31.828,36.01 ccw(c41.98,44.435) 41.98,31.242 ; Q1.2@32.637,31.242 ccw(c32.637,40.709) Q3.2@39.331,34.015 ; 33.844,31.242 ccw(c33.844,39.502) Q3.2@39.684,33.661 ; 35.051,31.242 ccw(c35.051,38.295) Q3.2@40.038,33.308 ; 36.258,31.242 ccw(c36.258,37.088) Q3.2@40.391,32.954 ; 37.465,31.242 ccw(c37.465,35.881) Q3.2@40.745,32.601 ; 38.672,31.242 ccw(c38.672,34.673) Q3.2@41.099,32.247 ; 39.879,31.242 ccw(c39.879,33.466) Q3.2@41.452,31.894 ; 41.086,31.242 ccw(c41.086,32.259) Q3.2@41.806,31.54 ; 41.981,31.242 7.798,31.242 7.366,31.674 7.366,32.898 C9.1@8.509,34.041 ; Q5.2@44.826,31.725 47.916,34.815 Q5.2@48.458,35.357 ; 15.113,36.754 24.181,36.754 25.603,36.754
  Bottom Layer w0.508: 9.408,35.341 9.809,35.341 9.919,35.341 ; 10.606,36.028 11.154,36.576 ; 13.081,36.449 13.259,36.449 13.335,36.525 ; 13.767,36.754 14.072,36.449 14.097,36.449 ; v2@13.771,42.219 cw(c12.983,41.431) 14.097,41.431 ; 14.097,35.916 14.097,36.449 ; 14.097,40.056 15.138,39.014 ; 15.113,36.373 15.011,36.373 14.935,36.449 ; 24.257,36.678 24.181,36.754 23.724,37.211 ; 26.06,36.449 15.113,36.449 14.935,36.449 ; 26.289,36.957 26.289,37.186 ; 26.289,37.44 26.289,37.186 ; Q1.2@26.614,37.485 cw(c27.729,36.37) 27.729,37.948 ; Q1.2@26.763,35.307 ccw(c24.884,35.831) 26.264,37.211 ; Q1.2@26.769,35.328 ccw(c24.953,35.849) 26.289,37.185 ; Q1.2@26.973,37.126 cw(c28.956,35.143) 28.956,37.948 ; Q1.2@27.332,36.767 cw(c30.182,33.917) 30.182,37.948 ; 27.585,37.946 cw(c26.714,33.984) Q1.2@30.7,34.733 ; Q1.2@27.691,36.408 cw(c31.408,32.691) 31.408,37.948 ; 27.813,37.948 cw(c27.813,26.477) Q3.2@36.993,33.355 ; Q1.2@28.018,36.992 cw(c27.275,38.171) 26.289,37.186 ; Q1.2@28.039,37.005 cw(c27.281,38.228) 26.264,37.211 ; Q1.2@28.05,36.049 cw(c32.635,31.464) 32.635,37.948 ; 28.335,37.781 cw(c27.534,34.138) Q1.2@31.2,34.827 ; Q1.2@28.41,35.689 cw(c33.861,30.238) 33.861,37.948 ; Q1.2@28.769,35.33 cw(c35.088,29.011) 35.088,37.948 ; 28.785,37.894 cw(c28.041,34.25) Q1.2@31.703,34.899 ; 28.828,37.948 cw(c28.828,27.237) Q3.2@37.4,33.659 ; Q1.2@29.128,34.971 cw(c36.314,27.785) Q3.2@36.314,37.948 ; Q1.2@29.487,34.612 cw(c37.541,26.558) Q3.2@37.541,37.948 ; 29.518,37.744 cw(c28.832,34.39) Q1.2@32.203,34.988 ; 29.844,37.948 cw(c29.844,27.998) Q3.2@37.806,33.964 ; Q1.2@29.846,34.253 cw(c38.767,25.332) Q3.2@38.767,37.948 ; 29.945,37.857 cw(c29.311,34.471) Q1.2@32.694,35.124 ; Q1.2@30.206,33.893 cw(c39.993,24.106) Q3.2@39.993,37.948 ; Q1.2@30.565,33.534 cw(c41.22,22.879) Q3.2@41.22,37.948 ; 30.859,37.948 cw(c30.859,28.759) Q3.2@38.213,34.268 ; Q1.2@30.924,33.175 cw(c42.446,21.653) 42.446,37.948 ; Q1.2@31.283,32.816 cw(c43.673,20.426) 43.673,37.948 ; Q1.2@31.642,32.457 cw(c44.899,19.2) 44.899,37.948 ; 31.874,37.948 cw(c31.874,29.519) Q3.2@38.619,34.573 ; 32.89,37.948 cw(c32.89,30.28) Q3.2@39.026,34.878 ; 33.905,37.948 cw(c33.905,31.041) Q3.2@39.432,35.182 ; 34.92,37.948 cw(c34.92,31.802) Q3.2@39.839,35.487 ; Q3.2@35.936,37.948 cw(c35.936,32.562) Q3.2@40.245,35.791 ; Q3.2@36.407,35.681 cw(c39.599,34.565) Q3.2@39.599,37.948 ; Q3.2@36.587,33.05 ccw(c26.797,25.716) 26.797,37.948 ; Q3.2@36.886,35.514 cw(c40.315,34.315) Q3.2@40.315,37.948 ; Q3.2@36.951,37.948 cw(c36.951,33.323) Q3.2@40.652,36.096 ; Q3.2@37.366,35.346 cw(c41.031,34.065) Q3.2@41.031,37.948 ; Q3.2@37.845,35.179 cw(c41.747,33.815) Q3.2@41.747,37.948 ; Q3.2@37.966,37.948 cw(c37.966,34.084) Q3.2@41.059,36.401 ; Q3.2@38.325,35.011 cw(c42.462,33.565) 42.462,37.948 ; Q3.2@38.804,34.843 cw(c43.178,33.314) 43.178,37.948 ; Q3.2@39.284,34.676 cw(c43.894,33.064) 43.894,37.948 ; Q3.2@39.763,34.508 cw(c44.609,32.814) 44.609,37.948 ; Q3.2@40.243,34.34 cw(c45.325,32.564) 45.325,37.948 ; Q3.2@40.722,34.173 cw(c46.041,32.314) 46.041,37.948 ; Q3.2@41.202,34.005 cw(c46.757,32.063) 46.757,37.948 ; Q3.2@41.682,33.838 cw(c47.472,31.813) 47.472,37.948 ; Q5.2@47.289,37.328 ccw(c47.217,37.763) 47.658,37.763 ; Q5.2@47.658,36.919 47.658,37.763 ; Q5.2@47.763,34.256 50.698,37.191 50.698,37.948 50.241,38.405 47.015,38.405 ; Q5.2@48.03,37.355 cw(c48.067,37.763) 47.658,37.763 ; 11.154,36.576 11.533,36.955 ; 11.154,36.576 11.205,36.525 13.335,36.525 ; 11.533,36.955 11.789,37.211 ; 11.533,36.955 13.362,36.955 13.564,36.754 ; 11.789,37.211 12.14,37.562 12.14,37.568 ; 11.789,37.211 14.021,37.211 ; 11.789,37.211 11.784,37.211 12.14,37.568 ; 12.14,37.568 12.241,37.668 ; 12.241,37.668 12.723,38.151 ; 12.241,37.668 14.097,37.668 ; 12.723,38.151 13.206,38.633 ; 12.723,38.151 14.097,38.151 ; 13.206,38.633 13.741,38.633 14.097,38.633 ; 13.206,38.633 14.097,39.524 14.097,39.37 ; 13.335,36.525 13.564,36.754 ; 13.564,36.754 14.021,37.211 ; 14.021,37.211 14.097,37.287 ; 14.021,37.211 14.097,37.211 ; 14.097,36.449 14.097,36.754 14.097,37.211 ; 14.097,36.449 14.935,36.449 ; 14.097,37.211 14.097,37.287 ; 14.097,37.211 14.173,37.211 ; 14.097,37.287 14.097,37.668 ; 14.097,37.287 14.173,37.211 ; 14.097,37.668 14.097,38.151 ; 14.097,37.668 23.266,37.668 ; 14.097,38.151 15.316,38.151 ; 14.097,38.151 14.097,38.633 ; 14.097,38.633 14.097,38.989 14.097,39.37 ; 14.097,38.633 14.834,38.633 ; 14.097,39.37 14.453,39.014 ; 14.173,37.211 14.63,36.754 14.935,36.449 ; 14.173,37.211 23.724,37.211 ; 14.453,39.014 15.138,39.014 ; 14.453,39.014 14.834,38.633 ; 14.834,38.633 15.265,38.633 ; 14.834,38.633 15.316,38.151 ; 15.138,39.014 21.92,39.014 22.301,38.633 ; 15.138,39.014 15.265,38.887 15.265,38.633 ; 15.265,38.633 22.301,38.633 ; 15.316,38.151 22.784,38.151 ; 22.301,38.633 22.784,38.151 ; 22.784,38.151 23.266,37.668 ; 23.266,37.668 23.724,37.211 ; 23.724,37.211 26.06,37.211 26.264,37.211 ; 26.264,37.211 26.289,37.186 ; 26.797,37.948 47.473,37.948 ; 26.797,37.948 27.254,38.405 47.015,38.405 ; 47.015,38.405 47.473,37.948 ; 47.473,37.948 47.658,37.763
  Bottom Layer w1: 13.741,38.633 14.097,38.989 ; 14.097,39.524 14.097,40.056 v2@14.097,42.24
  Bottom Layer w2: C9.1@8.509,33.655 28.9,33.655 Q1.2@29.577,34.332 Q3.2@37.324,34.332 ; 23.15,33.655 ccw(c23.15,40.569) Q1.2@28.039,35.68 ; 25.502,33.655 cw(c25.502,30.067) Q1.2@28.039,32.604 ; Q1.2@29.75,34.497 cw(c33.326,33.979) 33.326,37.592 ; Q1.2@31.115,32.794 cw(c34.828,29.081) 34.828,34.332 cw(c34.828,39.583) Q1.2@31.115,35.87 ; Q1.2@31.73,34.21 cw(c35.636,33.645) 35.636,37.592 ; 33.457,34.332 ccw(c33.457,39.888) Q3.2@37.386,35.959 ; 33.889,34.332 cw(c33.889,29.386) Q3.2@37.386,32.883 ; 35.277,37.592 cw(c35.277,34.041) Q3.2@38.753,34.766 ; Q3.2@36.75,34.838 ccw(c32.948,34.903) 35.636,37.592 ; Q3.2@36.795,34.358 ccw(c32.817,33.529) 32.817,37.592 35.636,37.592 ; Q3.2@38.328,36.893 cw(c37.577,39.532) 35.636,37.592 ; Q3.2@38.924,34.611 38.617,34.611 35.636,37.592 ; Q3.2@40.169,34.815 Q5.2@47.916,34.815 ; Q3.2@40.462,33.263 cw(c44.207,29.519) 44.207,34.815 ; Q3.2@40.462,36.339 ccw(c44.143,40.02) 44.143,34.815 ; Q3.2@41.622,34.815 cw(c41.622,28.305) Q5.2@46.225,32.908 ; 43.403,34.815 ccw(c43.403,38.806) Q5.2@46.225,35.984
  other v2: 10.033,31.242 11.405,31.293 8.433,31.394 11.354,32.563 10.084,32.588 11.379,33.909 10.135,33.934
BREAK: J9.1 U5.21 | length 38.1
  Top Layer w0.35: v1@64.047,27.496 cw(c63.488,26.938) 64.278,26.938 ; v1@64.278,27.584 U5.21@64.278,24.766 64.278,23.962 U5.21@64.287,23.952
  Bottom Layer w0.35: v1@64.135,27.635 70.688,27.635 73.64,24.683 73.64,12.404 75.794,10.251 ; v1@64.223,27.496 cw(c64.559,27.16) 64.559,27.635 ; 74.16,11.885 cw(c71.724,9.449) J9.1@75.169,9.449 ; 74.757,11.287 cw(c72.919,9.449) J9.1@75.519,9.449 ; 75.355,10.69 cw(c74.114,9.449) J9.1@75.869,9.449 ; J9.1@75.641,10.055 ccw(c75.592,10.251) 75.794,10.251 ; J9.1@75.794,9.449 75.794,10.251 ; J9.1@75.946,10.055 cw(c75.996,10.251) 75.794,10.251
  other v1: 64.135,27.584
CW/CCW: J9.3 U5.22 | length 31.8
  Top Layer w0.35: 64.918,27.425 cw(c66.276,27.425) v1@65.316,28.385 ; 64.918,28.036 cw(c65.23,28.036) v1@65.228,28.348 ; 64.918,28.27 cw(c65.431,28.27) v1@65.068,28.632 ; U5.22@64.948,23.952 64.918,23.982 U5.22@64.918,24.766 64.918,28.164 v1(65.227,28.473) ; v1@65.102,28.473 cw(c64.8,28.473) 65.014,28.26 cw(c65.227,28.047) v1@65.227,28.348
  Bottom Layer w0.35: v1(65.227,28.473) 71.298,28.473 74.371,25.4 74.371,15.951 J9.3@75.794,14.529 ; v1@65.316,28.385 cw(c65.529,28.172) 65.529,28.473 cw(c65.529,28.775) v1@65.316,28.562 ; J9.3@75.169,14.529 ccw(c73.66,14.529) 74.727,15.596 ccw(c75.794,16.663) J9.3@75.794,15.154